# Altium PCB 电机控制PCB.PcbDoc
Units mm, origin at the board's own origin, x right, y up, seen from the top; angles counter-clockwise.
Board outline 67.08 x 50.94 mm, 2 copper layers (Top Layer, Bottom Layer); 44 components, 44 nets, 212 pads, 111 vias.
Unrouted connection lines stored in the file: 123.
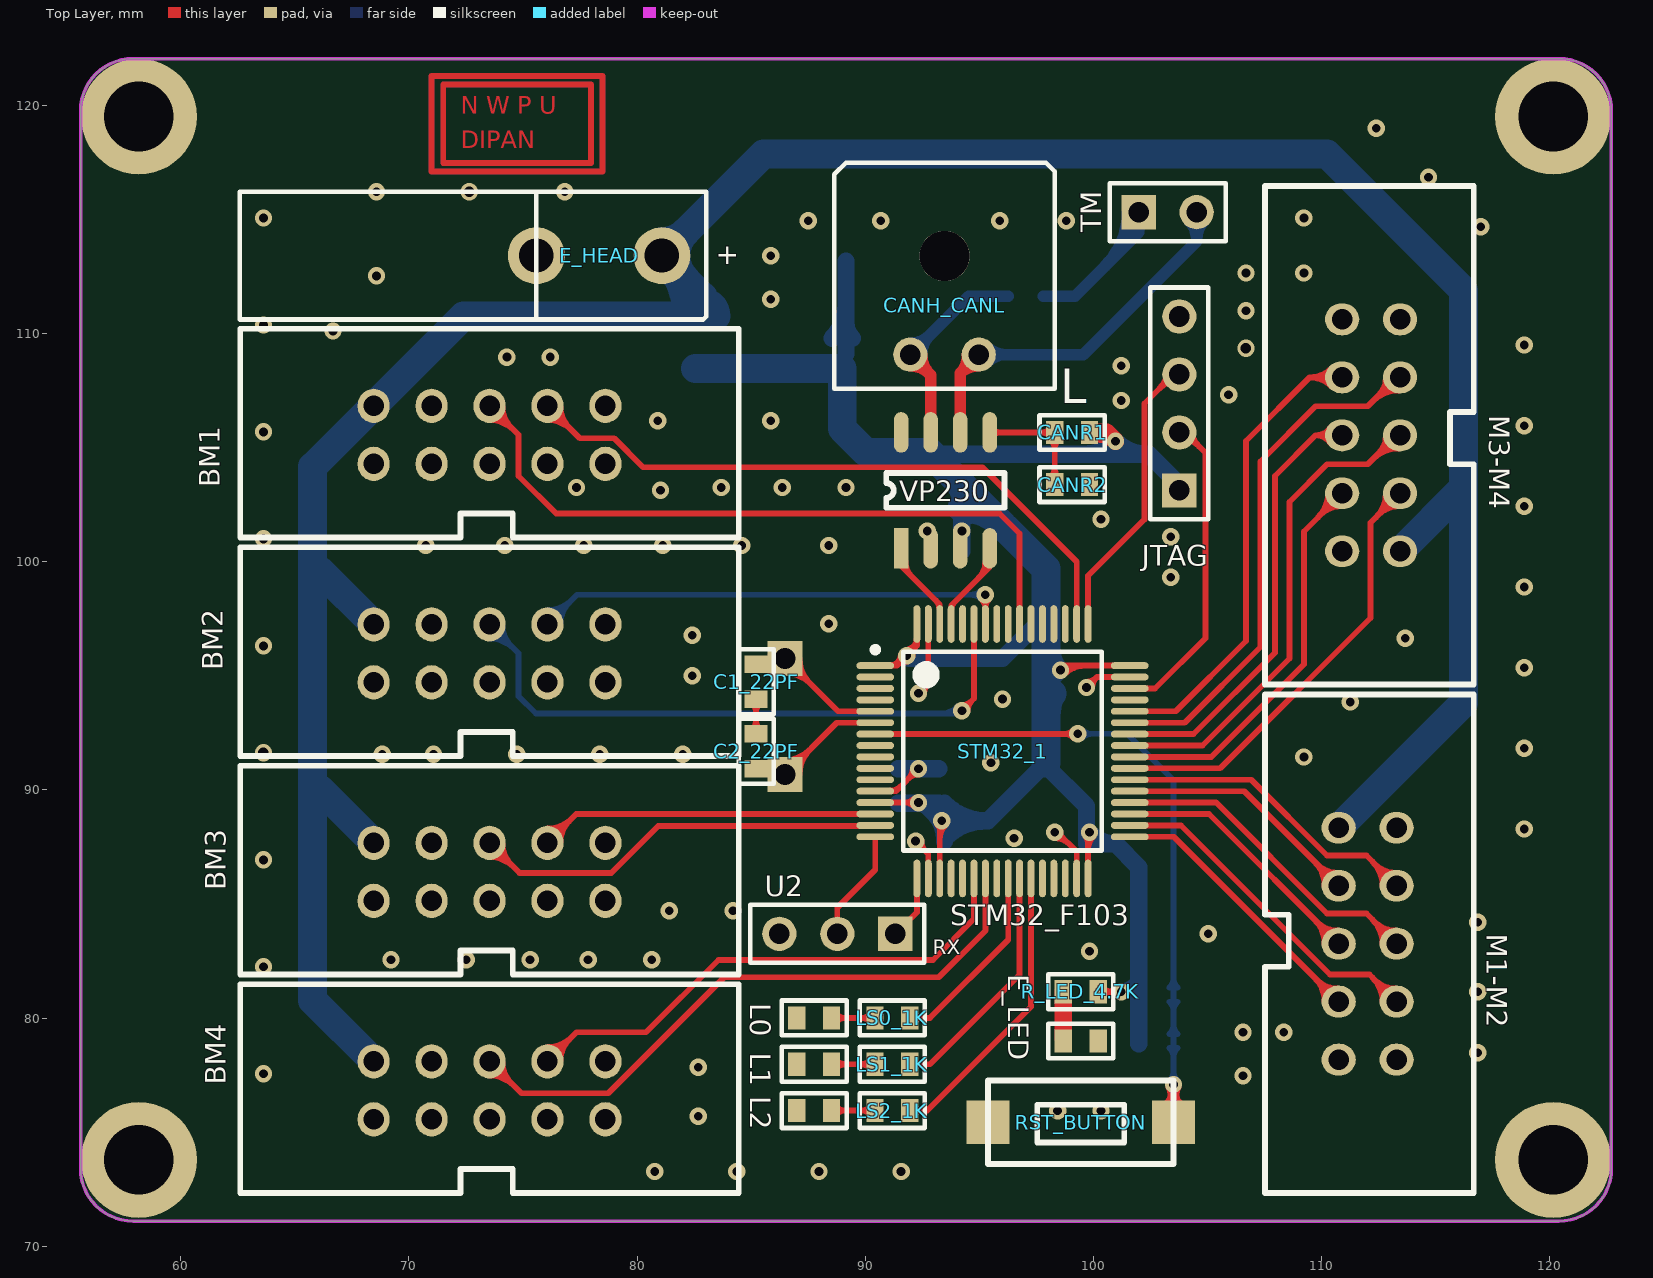
[diagram p0: Top Layer view]
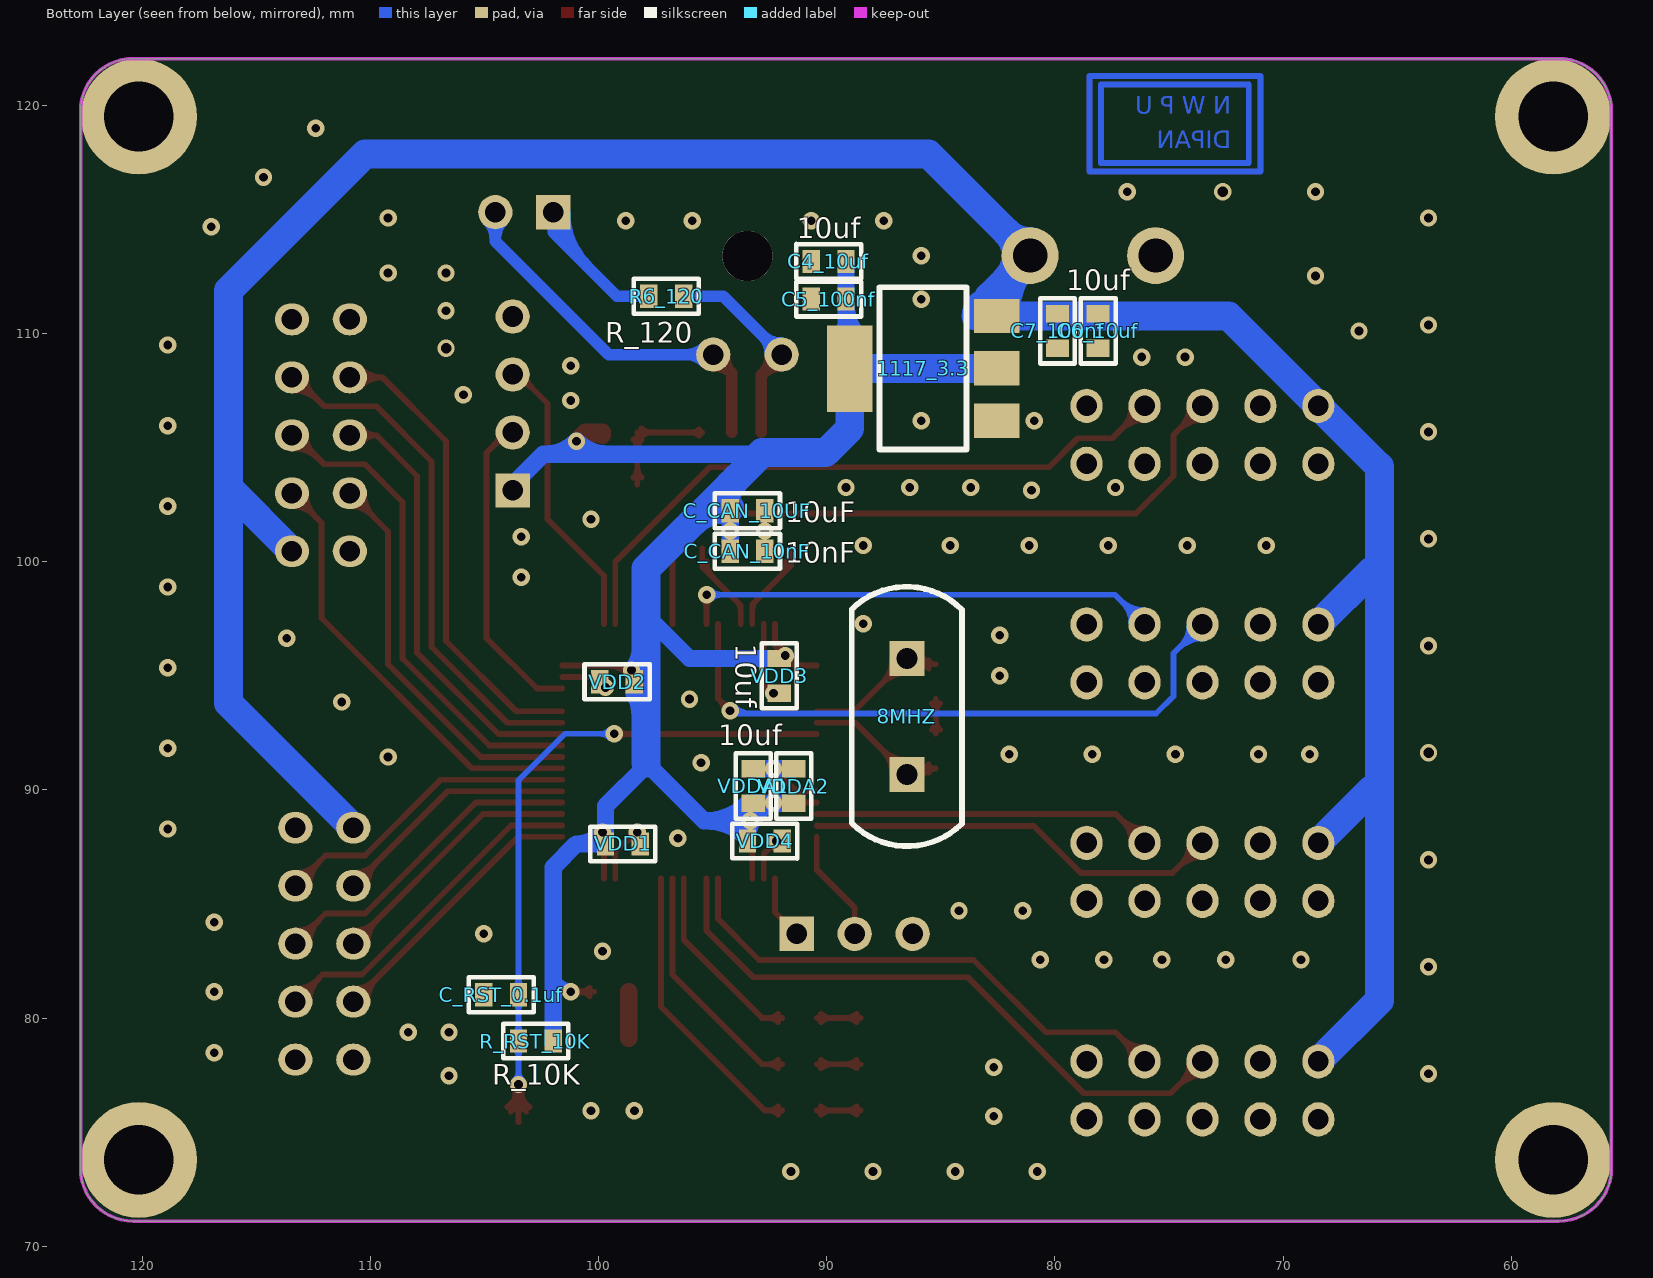
[diagram p1: Bottom Layer view, seen from below]

## Layer stack, top to bottom
Top Layer: signal copper 0.0356
Dielectric: dielectric 0.32, FR-4, Dk 4.8
Bottom Layer: signal copper 0.0356

## Board outline
57.912,71.106 cw(c57.912,73.406) 55.612,73.406 55.612,119.747 cw(c57.912,119.747) 57.912,122.047 120.396,122.047 cw(c120.396,119.747) 122.696,119.747 122.696,73.406 cw(c120.396,73.406) 120.396,71.106

## Design rules (kind name [scope] priority, off if disabled: settings)
Clearance [All] p1: gap=0.152
ComponentClearance [All] p1 off: gap=0 collisioncheckmode=3 verticalgap=2540 showdistances=FALSE
PlaneConnect [All] p1: planeconnectstyle=Direct reliefexpansion=0.508 reliefentries=4 reliefconductorwidth=0.254 reliefairgap=0.254
PolygonConnect [All] p1: connectstyle=Direct reliefconductorwidth=0.254 reliefentries=4 polygonreliefangle="90 Angle" airgapwidth=0.254
RoutingVias [All] p1: holewidth=0.508 width=0.762 viastyle="Through Hole" minholewidth=0.381 minwidth=0.635 maxholewidth=0.762 maxwidth=0.762
SolderMaskExpansion [All] p1: expansion=0.102
Width [All] p1: maxlimit=1.27 minlimit=0.051 preferedwidth=0.254
26 further rules are at their usual default settings.

## Components (designator, comment, footprint, x,y, rotation, side; value= is the part's Value field where it differs from the comment)
8MHZ "XTAL" XTAL_D 86.487,95.758 r270 bottom
1117_3.3 "1117_WYN" SOT-223_WYN 82.55,106.172 r90 bottom
BM1 "2*5BM" JTAG_10to20#1 73.533,104.289 r90 top
BM2 "2*5BM" JTAG_10to20#1 73.533,94.714 r90 top
BM3 "2*5BM" JTAG_10to20#1 73.533,85.14 r90 top (schematic designator BM4)
BM4 "2*5BM" JTAG_10to20#1 73.533,75.565 r90 top (schematic designator BM3)
C1_22PF "22pf" 0603_WYH 85.217,94.742 r90 top
C2_22PF "22pf" 0603_WYH 85.217,91.694 r270 top
C4_10uf "10uf" 0603_WYH 89.916,113.157 r0 bottom
C5_100nf "C_100nf" 0603_WYH 89.916,111.506 r0 bottom
C6_10uf "10uf" 0603_WYH 78.105,110.109 r270 bottom
C7_100nf "C_100nf" 0603_WYH 79.883,110.109 r270 bottom
C_CAN_10nF "10nF" 0603_WYH 93.472,100.457 r0 bottom
C_CAN_10UF "10uF" 0603_WYH 93.472,102.235 r0 bottom
C_RST_0.1uf "0.1uf" 0603_WYH 104.267,81.026 r0 bottom
CANH_CANL "CAN_HEADER" CAN信号 93.472,107.575 r90 top
CANR1 "1k" 0603_WYH 99.06,105.664 r0 top
CANR2 "1k" 0603_WYH 99.06,103.378 r0 top
E_HEAD "Header2" Power 62.584,113.411 r0 top
E_LED "LED_WYN" 0603_WYH 99.441,78.994 r0 top
JTAG "2_JTAG" 2_JTAG 103.759,103.124 r90 top
L0 "LED_WYN" 0603_WYH 87.757,80.01 r180 top (schematic designator LS0)
L1 "LED_WYN" 0603_WYH 87.757,77.978 r180 top (schematic designator LS1)
L2 "LED_WYN" 0603_WYH 87.757,75.946 r180 top (schematic designator LS2)
LS0_1K "10K" 0603_WYH 91.186,80.01 r180 top
LS1_1K "10K" 0603_WYH 91.186,77.978 r180 top
LS2_1K "10K" 0603_WYH 91.186,75.946 r180 top
M1-M2 "M1-M2" JTAG_10to20#2 110.744,83.261 r0 top (schematic designator BM3)
M3-M4 "M3-M4" JTAG_10to20#1 113.436,105.537 r180 top (schematic designator BM3)
R6_120 "R_120" 0603_WYH 97.028,111.633 r0 bottom (schematic designator R6_120Ω)
R_LED_4.7K "4.7K" 0603_WYH 99.441,81.153 r0 top
R_RST_10K "R_10K" 0603_WYH 102.743,78.994 r0 bottom
RST_BUTTON "RST_BUTTON" CLCK 103.505,75.438 r180 top
STM32_1 "STM32_F103" STM32TSQFP50P1200X1200X160-64N 96.012,91.694 r0 top
TM "Header2" HDR1X2 101.981,115.316 r0 top
U2 "三针串口" HDR1X3 88.773,83.693 r180 top (schematic designator USART3)
VDD1 "100nf" 0603_WYH 98.933,87.63 r180 bottom
VDD2 "100nf" 0603_WYH 99.187,94.742 r0 bottom
VDD3 "10uf" 0603_WYH 92.075,94.996 r270 bottom
VDD4 "100nf" 0603_WYH 92.71,87.757 r180 bottom
VDDA1 "10uf" 0603_WYH 93.218,90.17 r90 bottom
VDDA2 "100nf" 0603_WYH 91.44,90.17 r90 bottom
VP230 "VP230" VP230 91.567,100.584 r90 top
? "LOGO" LOGO 73.533,120.015 r0 top

## Footprints (in the part's own frame and the unit in brackets; to place one, negate y for a bottom-side part, rotate by r counter-clockwise, add the part's x,y. Pads: shape width x height; smd on the part's side, far side on the other; paste and mask are expansions set on the pad)
2_JTAG [mm]
  rect 1.5x1.5 hole 0.9: 1(0,0)
  round 1.5 hole 0.9: 2(2.54,0) 3(5.08,0) 4(7.62,0)
  silkscreen extent -1.27,-1.27 8.89,1.27
0603_WYH [mil]
  rect 30x40 smd: 1(-30,0) 2(30,0)
  silkscreen extent -56,-30 56,30
CAN信号 [mm]
  round 1.5 hole 0.9: 1(1.5,1.5) 2(1.5,-1.5)
  round 2.2 hole 2.2: 3(5.82,0)
  silkscreen extent 0,-4.83 9.91,4.83
CLCK [mil]
  rect 75x75 smd: 1(0,0) 2(320,0)
  silkscreen extent 0,-72 320,72
HDR1X2 [mm]
  rect 1.5x1.5 hole 0.9: 1(0,0)
  round 1.5 hole 0.9: 2(2.54,0)
  silkscreen extent -1.27,-1.27 3.81,1.27
HDR1X3 [mm] "Connector; Header; 3 Position"
  rect 1.5x1.5 hole 0.9: 1(-2.54,0)
  round 1.5 hole 0.9: 2(0,0) 3(2.54,0)
  silkscreen extent -3.81,-1.27 3.81,1.27
JTAG_10to20#1 [mil]
  oval 59x55 hole 35.4: 1(0,200) 2(0,100) 3(0,0) 4(0,-100) 5(0,-200) 6(100,-200) 7(100,-100) 8(100,0) 9(100,100) 10(100,200)
  silkscreen extent -127,-430 233,430
JTAG_10to20#2 [mil]
  oval 59x55 hole 35.4: 1(0,200) 2(0,100) 3(0,0) 4(0,-100) 6(100,-200) 7(100,-100) 8(100,0) 9(100,100) 10(100,200)
  oval 59x55 hole 35.4 mask+4: 5(0,-200)
  silkscreen extent -127,-430 233,430
LOGO [mm]
  Top Layer lines w0.254: -2.54,-2.921 -2.54,1.016 -2.54,1.27 4.953,1.27 4.953,-2.921 -2.54,-2.921 ; -2.032,-2.54 -2.032,0.889 4.445,0.889 4.445,-2.54 -2.032,-2.54
  Bottom Layer lines w0.254: -2.54,-2.921 -2.54,1.27 4.953,1.27 4.953,-2.921 -2.54,-2.921 ; -2.032,-2.54 -2.032,0.889 4.445,0.889 4.445,-2.54 -2.032,-2.54
Power [mm]
  round 2.5 hole 1.5: 1(18.5,0) 2(13,0)
  silkscreen extent 0,-2.8 20.45,2.8
SOT-223_WYN [mil]
  rect 59x79 smd: 1(0,0) 2(90.55,0) 3(181.1,0)
  rect 150x79 smd: 4(89.88,253.54)
  silkscreen extent -49,52 231,202
STM32TSQFP50P1200X1200X160-64N [mm] "TSQFP, 64-Leads, Body 12.0x12.0mm (max), Pitch 0.50mm, IPC Medium Density"
  oval 1.65x0.3 smd: 1(-5.575,3.75) 2(-5.575,3.25) 3(-5.575,2.75) 4(-5.575,2.25) 5(-5.575,1.75) 6(-5.575,1.25) 7(-5.575,0.75) 8(-5.575,0.25) 9(-5.575,-0.25) 10(-5.575,-0.75) 11(-5.575,-1.25) 12(-5.575,-1.75) 13(-5.575,-2.25) 14(-5.575,-2.75) 15(-5.575,-3.25) 16(-5.575,-3.75) 34(5.575,-3.25) 35(5.575,-2.75) 36(5.575,-2.25) 37(5.575,-1.75) 38(5.575,-1.25) 39(5.575,-0.75) 40(5.575,-0.25) 41(5.575,0.25) 42(5.575,0.75) 43(5.575,1.25) 44(5.575,1.75) 45(5.575,2.25) 46(5.575,2.75) 47(5.575,3.25) 48(5.575,3.75)
  oval 0.3x1.65 smd: 17(-3.75,-5.575) 18(-3.25,-5.575) 19(-2.75,-5.575) 20(-2.25,-5.575) 21(-1.75,-5.575) 22(-1.25,-5.575) 23(-0.75,-5.575) 24(-0.25,-5.575) 25(0.25,-5.575) 26(0.75,-5.575) 27(1.25,-5.575) 28(1.75,-5.575) 29(2.25,-5.575) 30(2.75,-5.575) 31(3.25,-5.575) 32(3.75,-5.575) 49(3.75,5.575) 50(3.25,5.575) 51(2.75,5.575) 52(2.25,5.575) 53(1.75,5.575) 54(1.25,5.575) 55(0.75,5.575) 56(0.25,5.575) 57(-0.25,5.575) 58(-0.75,5.575) 59(-1.25,5.575) 60(-1.75,5.575) 61(-2.25,5.575) 62(-2.75,5.575) 63(-3.25,5.575) 64(-3.75,5.575)
  oval 1.65x0.3 smd paste+0: 33(5.575,-3.75)
  silkscreen extent -5.7,-4.35 4.35,4.57, body extent -5,-5 5,5, height 1.6
VP230 [mil]
  rect 70x25 smd: 1(0,0)
  oval 70x25 smd: 2(0,-51) 3(0,-102) 4(0,-153) 5(200,-153) 6(200,-102) 7(200,-51) 8(200,0)
  silkscreen extent 70,-179 130,26
XTAL_D [mil]
  rect 60x60 hole 36 paste+0: 1(0,0) 2(200,0)
  silkscreen extent -124,-95 324,95

## Part data
C1_22PF C2_22PF C4_10uf C5_100nf C6_10uf C7_100nf C_CAN_10nF C_CAN_10UF C_RST_0.1uf VDD1 VDD2 VDD3 VDD4 VDDA1 VDDA2: library part CAP_WYN
CANR1 CANR2 LS0_1K LS1_1K LS2_1K R6_120 R_RST_10K: library part R
M1-M2 M3-M4: library part 电机接口
R_LED_4.7K: library part RES_WYN

## Free pads (board coordinates)
  round 5.08 hole 3.048: 1(120.142,119.507) 2(120.142,73.787) 3(58.166,73.787) 6(58.166,119.507)

## Via types
v1: diameter 0.762, hole 0.381, Top Layer to Bottom Layer, 108 vias
v2: diameter 0.762, hole 0.457, Top Layer to Bottom Layer, 3 vias

## Nets (pads, with @x,y where several pads share a name; then routed paths per layer and width w, separated by ;. In a path a pad name is that pad's centre, name@x,y a point inside that pad or via, vN(x,y) a via of type N, cw(c..) or ccw(c..) an arc to the next point about the centre after c; other vN are vias at no path point)
B1_PA15: BM1.7 STM32_1.50 | length 31.6
  Top Layer w0.254: BM1.7@76.073,106.207 cw(c76.073,104.704) 77.135,105.767 ; BM1.7@76.073,106.461 cw(c76.073,105.572) 76.702,106.2 ; BM1.7 77.492,105.41 78.994,105.41 80.264,104.14 95.123,104.14 99.262,100.001 STM32_1.50 ; BM1.7@76.644,106.778 ccw(c77.902,106.778) 77.013,105.889
B1_PB3: BM1.8 STM32_1.55 | length 33.4
  Top Layer w0.254: BM1.8@73.533,106.207 cw(c73.533,104.704) 74.595,105.767 ; BM1.8@73.533,106.461 cw(c73.533,105.572) 74.162,106.2 ; BM1.8 74.803,105.559 74.803,103.759 76.454,102.108 95.885,102.108 96.762,101.231 STM32_1.55 ; BM1.8@74.105,106.778 ccw(c75.362,106.778) 74.473,105.889
B2_PA6: BM4.7 STM32_1.22 | length 25.9
  Top Layer w0.254: BM4.7 77.343,79.375 80.391,79.375 83.566,82.55 92.964,82.55 94.762,84.348 STM32_1.22 ; BM4.7@76.073,78.473 ccw(c76.073,79.362) 76.702,78.734 ; BM4.7@76.073,78.727 ccw(c76.073,80.23) 77.135,79.167 ; BM4.7@76.644,78.156 cw(c77.902,78.156) 77.013,79.045
B2_PA7: BM4.8 STM32_1.23 | length 30.4
  Top Layer w0.254: BM4.8@73.533,77.483 cw(c73.533,75.98) 74.595,77.043 ; BM4.8@73.533,77.737 cw(c73.533,76.848) 74.162,77.476 ; BM4.8 74.93,76.708 78.74,76.708 83.82,81.788 93.218,81.788 95.262,83.832 STM32_1.23 ; BM4.8@74.105,78.054 ccw(c75.362,78.054) 74.473,77.165
B3_PB6: BM2.7 STM32_1.58 | length 25.7
  Top Layer w0.254: v1@95.07,98.372 cw(c94.608,97.91) STM32_1.58@95.262,97.91 ; STM32_1.58 v1@95.262,98.437 ; STM32_1.58@95.262,97.968 cw(c95.834,97.968) v1@95.43,98.372
  Bottom Layer w0.254: BM2.7 77.371,98.552 v1(95.25,98.552) ; BM2.7@76.073,97.623 ccw(c76.073,98.512) 76.702,97.883 ; BM2.7@76.073,97.877 ccw(c76.073,99.379) 77.135,98.317 ; BM2.7@76.644,97.305 cw(c77.902,97.305) 77.013,98.194 ; v1@95.07,98.372 ccw(c94.637,97.939) 94.637,98.552 ccw(c94.637,99.165) v1@95.07,98.732
B3_PB7: BM2.8 STM32_1.59 | length 32.1
  Top Layer w0.254: v1(94.234,93.472) 94.762,94 STM32_1.59 ; v1@94.234,93.726 ccw(c94.234,94.339) 94.668,93.906 ccw(c95.101,93.472) v1@94.488,93.472
  Bottom Layer w0.254: BM2.8@73.533,96.632 cw(c73.533,95.13) 74.595,96.192 ; BM2.8@73.533,96.886 cw(c73.533,95.997) 74.162,96.626 ; BM2.8 74.803,95.984 74.803,94.107 75.565,93.345 v1@94.234,93.345 ; BM2.8@74.105,97.204 ccw(c75.362,97.204) 74.473,96.315 ; 93.314,93.345 ccw(c93.314,94.392) v1@94.054,93.652
B4_PA0: BM3.7 STM32_1.14 | length 17.8
  Top Layer w0.254: BM3.7 77.337,88.944 STM32_1.14 ; BM3.7@76.073,88.048 ccw(c76.073,88.937) 76.702,88.308 ; BM3.7@76.073,88.302 ccw(c76.073,89.804) 77.135,88.742 ; BM3.7@76.644,87.731 cw(c77.902,87.731) 77.013,88.619
B4_PA1: BM3.8 STM32_1.15 | length 21.2
  Top Layer w0.254: BM3.8@73.533,87.057 cw(c73.533,85.555) 74.595,86.617 ; BM3.8@73.533,87.311 cw(c73.533,86.422) 74.162,87.051 ; BM3.8 74.853,86.36 78.867,86.36 80.929,88.422 90.415,88.422 STM32_1.15 ; BM3.8@74.105,87.629 ccw(c75.362,87.629) 74.473,86.74
CANH: CANH_CANL.1 R6_120.1 VP230.7 | length 12.9
  Top Layer w0.508: CANH_CANL.1@91.972,108.579 cw(c91.972,107.396) 92.808,108.233 ; CANH_CANL.1@91.972,109.069 92.862,108.179 VP230.7 ; CANH_CANL.1@92.468,109.075 ccw(c93.68,109.075) 92.823,108.218
  Bottom Layer w0.508: CANH_CANL.1 94.53,111.633 R6_120.1 ; CANH_CANL.1@91.972,109.571 ccw(c91.972,110.768) 92.819,109.922 ccw(c93.665,109.075) CANH_CANL.1@92.468,109.075
CANL: CANH_CANL.2 TM.2 VP230.6 | length 22.2
  Top Layer w0.508: VP230.6 94.158,108.255 ; CANH_CANL.2@94.476,109.059 cw(c93.388,109.025) 94.158,108.255 ; CANH_CANL.2@94.962,108.579 ccw(c94.941,107.472) 94.158,108.255 ; CANH_CANL.2@94.972,109.069 94.158,108.255
  Bottom Layer w0.508: CANH_CANL.2 99.55,109.075 104.521,114.046 TM.2 ; CANH_CANL.2@95.323,108.724 cw(c96.169,107.878) 96.169,109.075 cw(c96.169,110.272) CANH_CANL.2@95.323,109.426 ; TM.2@104.17,114.965 cw(c103.324,114.119) 104.521,114.119 cw(c105.718,114.119) TM.2@104.872,114.965
CANRX: STM32_1.61 VP230.4 | length 5.1
  Top Layer w0.254: STM32_1.61 93.762,98.08 95.453,99.771 VP230.4 ; STM32_1.61@93.785,97.944 cw(c94.169,97.944) 93.897,98.215 ; 94.957,99.275 ccw(c94.22,100.013) VP230.4@95.263,100.013
CANTX: STM32_1.62 VP230.1 | length 5.1
  Top Layer w0.254: VP230.1 91.567,99.822 93.262,98.127 STM32_1.62 ; VP230.1@91.757,100.012 ccw(c92.677,100.012) 92.027,99.362 ; 93.093,98.296 cw(c92.742,97.944) STM32_1.62@93.239,97.944
GND: 1117_3.3.1 BM1.2 BM2.2 BM3.2 BM4.2 C1_22PF.1 C2_22PF.1 C4_10uf.2 C5_100nf.2 C6_10uf.2 C7_100nf.2 C_CAN_10nF.1 C_CAN_10UF.1 C_RST_0.1uf.2 CANR2.2 E_HEAD.2 E_LED.2 JTAG.4 L0.2 L1.2 L2.2 M1-M2.5 M3-M4.5 RST_BUTTON.2 STM32_1.12 STM32_1.18 STM32_1.28 STM32_1.31 STM32_1.47 STM32_1.63 U2.3 VDD1.2 VDD2.2 VDD3.2 VDD4.2 VDDA1.2 VDDA2.2 VP230.2 VP230.8 | length 22.4
  Top Layer w0.254: C2_22PF.1@85.037,92.636 ccw(c84.604,93.069) 85.217,93.069 ccw(c85.83,93.069) C2_22PF.1@85.397,92.636 ; C1_22PF.1@85.037,93.8 cw(c84.604,93.367) 85.217,93.367 cw(c85.83,93.367) C1_22PF.1@85.397,93.8 ; C2_22PF.1 C1_22PF.1 ; STM32_1.12 91.341,89.944 v1(92.329,90.932) ; STM32_1.12@91.112,89.967 ccw(c91.112,90.575) 91.542,90.145 ; v1@92.075,90.932 cw(c91.462,90.932) 91.895,90.498 cw(c92.329,90.065) v1@92.329,90.678 ; v1@92.202,87.503 cw(c92.202,86.89) 92.636,87.323 cw(c93.069,87.757) v1@92.456,87.757 ; v1(92.202,87.757) 92.762,87.197 STM32_1.18 ; v1(92.329,94.234) 92.762,94.667 ; v1@92.329,94.488 ccw(c92.33,95.099) 92.762,94.667 ; v1@92.583,94.234 cw(c93.194,94.235) 92.762,94.667 ; STM32_1.63 92.762,94.667 ; v1@98.298,87.884 cw(c98.298,86.964) 98.948,87.615 ; v1@98.425,88.138 99.262,87.301 STM32_1.31 ; v1@98.552,88.138 ccw(c98.859,88.138) 98.642,87.921 ; v1(99.695,94.488) 100.151,94.944 STM32_1.47 ; v1@99.695,94.742 ccw(c99.695,95.355) 100.129,94.922 ccw(c100.562,94.488) v1@99.949,94.488
  Bottom Layer w0.762: VDDA2.2 VDDA1.2
  other v1: 80.772,73.279 84.37,73.279 87.969,73.279 91.567,73.279 82.677,75.692 98.425,75.946 100.33,75.946 106.553,77.47 63.627,77.555 82.677,77.851 116.84,78.486 106.553,79.375 108.331,79.375 116.84,81.153 63.627,82.243 69.215,82.55 72.517,82.55 75.311,82.55 77.851,82.55 80.645,82.55 99.822,82.931 105.029,83.693 116.84,84.201 81.407,84.709 84.201,84.709 63.627,86.931 96.52,87.884 98.298,88.138 118.872,88.286 95.504,91.186 109.22,91.44 68.834,91.567 71.078,91.567 74.718,91.567 78.359,91.567 82,91.567 118.872,91.821 111.252,93.853 96.012,93.98 82.423,94.996 118.872,95.356 63.627,96.308 113.665,96.647 82.423,96.774 88.392,97.282 118.872,98.891 103.378,99.314 70.739,100.711 74.2,100.711 77.66,100.711 81.121,100.711 84.582,100.711 88.392,100.711 63.627,100.997 103.378,101.092 92.71,101.346 100.33,101.854 118.872,102.425 81.026,103.124 77.343,103.251 83.693,103.251 86.36,103.251 89.154,103.251 63.627,105.685 118.872,105.96 80.899,106.172 85.852,106.172 101.219,107.061 105.918,107.315 101.219,108.585 74.295,108.966 76.2,108.966 118.872,109.495 66.675,110.109 63.627,110.374 106.68,110.998 85.852,111.506 68.58,112.522 106.68,112.649 109.22,112.649 85.852,113.411 116.967,114.681 87.503,114.935 90.678,114.935 95.885,114.935 98.806,114.935 63.627,115.062 109.22,115.062 68.58,116.205 76.835,116.205 114.681,116.84 112.395,118.999
  other v2: 63.627,91.62 106.68,109.347 72.644,116.205
JTCK: JTAG.3 STM32_1.49 | length 14.8
  Top Layer w0.254: STM32_1.49 99.762,99.381 102.235,101.854 102.235,106.934 JTAG.3@103.759,108.458 ; JTAG.3@103.251,108.458 cw(c102.025,108.458) 102.892,107.591 cw(c103.759,106.724) JTAG.3@103.759,107.95
JTMS: JTAG.2 STM32_1.46 | length 15.9
  Top Layer w0.254: STM32_1.46 102.699,94.444 104.902,96.647 104.902,104.775 JTAG.2@103.759,105.918 ; JTAG.2@103.759,105.41 cw(c103.759,104.184) 104.626,105.051 cw(c105.493,105.918) JTAG.2@104.267,105.918
JTRST: STM32_1.56
LS0: LS0_1K.1 STM32_1.25 | length 9.4
  Top Layer w0.254: LS0_1K.1 92.837,80.01 96.262,83.435 STM32_1.25 ; LS0_1K.1@92.128,79.83 cw(c92.561,79.397) 92.561,80.01 cw(c92.561,80.623) LS0_1K.1@92.128,80.19
LS1: LS1_1K.1 STM32_1.26 | length 11.6
  Top Layer w0.254: LS1_1K.1 92.837,77.978 96.762,81.903 STM32_1.26 ; LS1_1K.1@92.128,77.798 cw(c92.561,77.365) 92.561,77.978 cw(c92.561,78.591) LS1_1K.1@92.128,78.158
LS2: LS2_1K.1 STM32_1.27 | length 13.8
  Top Layer w0.254: LS2_1K.1 92.71,75.946 97.262,80.498 STM32_1.27 ; LS2_1K.1@92.128,75.766 cw(c92.561,75.333) 92.561,75.946 cw(c92.561,76.559) LS2_1K.1@92.128,76.126
M1_PC6: M1-M2.2 STM32_1.37 | length 13.7
  Top Layer w0.254: STM32_1.37 106.601,89.944 M1-M2.2 ; 109.682,86.864 cw(c108.619,85.801) M1-M2.2@110.122,85.801 ; 109.804,86.741 ccw(c110.693,87.63) M1-M2.2@110.693,86.373 ; 110.115,86.43 cw(c109.487,85.801) M1-M2.2@110.376,85.801
M2_PC7: M1-M2.9 STM32_1.38 | length 16.5
  Top Layer w0.254: STM32_1.38 106.914,90.444 110.236,87.122 111.963,87.122 M1-M2.9 ; 112.222,86.864 cw(c111.159,85.801) M1-M2.9@112.662,85.801 ; 112.344,86.741 ccw(c113.233,87.63) M1-M2.9@113.233,86.373 ; 112.655,86.43 cw(c112.027,85.801) M1-M2.9@112.916,85.801
M3_PC8: M3-M4.2 STM32_1.39 | length 22.1
  Top Layer w0.254: STM32_1.39 105.549,90.944 112.141,97.536 112.141,101.702 M3-M4.2 ; 112.374,101.935 ccw(c111.312,102.997) M3-M4.2@112.814,102.997 ; 112.497,102.057 cw(c113.386,101.168) M3-M4.2@113.386,102.425 ; 112.808,102.368 ccw(c112.179,102.997) M3-M4.2@113.068,102.997
M4_PC9: M3-M4.9 STM32_1.40 | length 20.4
  Top Layer w0.254: STM32_1.40 105.16,91.444 109.22,95.504 109.22,101.321 M3-M4.9 ; 109.834,101.935 ccw(c108.772,102.997) M3-M4.9@110.274,102.997 ; 109.957,102.057 cw(c110.846,101.168) M3-M4.9@110.846,102.425 ; 110.268,102.368 ccw(c109.639,102.997) M3-M4.9@110.528,102.997
M_PA8: M3-M4.3 STM32_1.41 | length 24.3
  Top Layer w0.254: STM32_1.41 104.771,91.944 108.585,95.758 108.585,102.616 110.236,104.267 112.014,104.267 M3-M4.3@113.284,105.537 ; 112.237,104.49 cw(c113.386,103.34) M3-M4.3@113.386,104.965 ; 112.482,104.735 ccw(c111.68,105.537) M3-M4.3@112.814,105.537 ; 112.67,104.923 cw(c113.386,104.208) M3-M4.3@113.386,105.219
M_PA9: M3-M4.8 STM32_1.42 | length 20.8
  Top Layer w0.254: STM32_1.42 104.382,92.444 107.95,96.012 107.95,103.759 109.728,105.537 ; M3-M4.8@110.382,105.202 ccw(c109.728,104.73) 109.728,105.537 ; M3-M4.8@110.382,105.872 cw(c109.728,106.344) 109.728,105.537 ; M3-M4.8 109.728,105.537
M_PA10: M3-M4.4 STM32_1.43 | length 25.7
  Top Layer w0.254: STM32_1.43 103.993,92.944 107.315,96.266 107.315,104.394 109.728,106.807 112.014,106.807 M3-M4.4@113.284,108.077 ; 112.237,107.03 cw(c113.386,105.88) M3-M4.4@113.386,107.505 ; 112.482,107.275 ccw(c111.68,108.077) M3-M4.4@112.814,108.077 ; 112.67,107.463 cw(c113.386,106.748) M3-M4.4@113.386,107.759
M_PA11: M3-M4.7 STM32_1.44 | length 23.7
  Top Layer w0.254: STM32_1.44 103.604,93.444 106.68,96.52 106.68,105.283 109.474,108.077 ; M3-M4.7@110.44,107.675 ccw(c109.474,106.717) 109.474,108.077 ; M3-M4.7@110.44,108.479 cw(c109.474,109.437) 109.474,108.077 ; M3-M4.7@110.62,107.853 ccw(c110.084,107.321) 110.084,108.077 ccw(c110.084,108.833) M3-M4.7@110.62,108.301 ; M3-M4.7@110.744,108.077 109.474,108.077
M_PB12: M1-M2.4 STM32_1.33 | length 15.5
  Top Layer w0.254: STM32_1.33 103.521,87.944 M1-M2.4 M1-M2.4@110.287,80.721 ; 109.682,81.784 cw(c108.619,80.721) M1-M2.4@110.122,80.721 ; 109.804,81.661 ccw(c110.693,82.55) M1-M2.4@110.693,81.293 ; 110.115,81.35 cw(c109.487,80.721) M1-M2.4@110.376,80.721
M_PB13: M1-M2.7 STM32_1.34 | length 17.8
  Top Layer w0.254: STM32_1.34 103.834,88.444 110.363,81.915 112.09,81.915 M1-M2.7 ; 112.222,81.784 cw(c111.159,80.721) M1-M2.7@112.662,80.721 ; 112.344,81.661 ccw(c113.233,82.55) M1-M2.7@113.233,81.293 ; 112.655,81.35 cw(c112.027,80.721) M1-M2.7@112.916,80.721
M_PB14: M1-M2.3 STM32_1.35 | length 14.4
  Top Layer w0.254: STM32_1.35 105.061,88.944 M1-M2.3 ; 109.682,84.324 cw(c108.619,83.261) M1-M2.3@110.122,83.261 ; 109.804,84.201 ccw(c110.693,85.09) M1-M2.3@110.693,83.833 ; 110.115,83.89 cw(c109.487,83.261) M1-M2.3@110.376,83.261
M_PB15: M1-M2.8 STM32_1.36 | length 17.1
  Top Layer w0.254: STM32_1.36 105.374,89.444 110.236,84.582 111.963,84.582 M1-M2.8 ; 112.222,84.324 cw(c111.159,83.261) M1-M2.8@112.662,83.261 ; 112.344,84.201 ccw(c113.233,85.09) M1-M2.8@113.233,83.833 ; 112.655,83.89 cw(c112.027,83.261) M1-M2.8@112.916,83.261
NetCANR1_1: CANR1.1 CANR2.1 VP230.5 | length 8.7
  Top Layer w0.254: VP230.5 CANR1.1 CANR2.1 ; VP230.5@95.588,105.529 cw(c95.913,105.204) 95.913,105.664 cw(c95.913,106.124) VP230.5@95.588,105.799 ; CANR2.1@98.118,103.685 ccw(c97.685,104.118) 98.298,104.118 ccw(c98.911,104.118) CANR2.1@98.478,103.685 ; CANR1.1@98.118,105.357 cw(c97.685,104.924) 98.298,104.924 cw(c98.911,104.924) CANR1.1@98.478,105.357 ; CANR1.1@98.118,105.484 ccw(c97.685,105.051) 97.685,105.664 ccw(c97.685,106.277) CANR1.1@98.118,105.844
NetE_LED_1: E_LED.1 R_LED_4.7K.1 | length 2
  Top Layer w0.762: E_LED.1@98.679,79.121 R_LED_4.7K.1
NetL0_1: L0.1 LS0_1K.2 | length 3.8
  Top Layer w0.254: L0.1 LS0_1K.2 ; L0.1@88.699,79.83 cw(c89.132,79.397) 89.132,80.01 cw(c89.132,80.623) L0.1@88.699,80.19 ; LS0_1K.2@90.244,79.83 ccw(c89.811,79.397) 89.811,80.01 ccw(c89.811,80.623) LS0_1K.2@90.244,80.19
NetL1_1: L1.1 LS1_1K.2 | length 3.8
  Top Layer w0.254: L1.1 LS1_1K.2 ; L1.1@88.699,77.798 cw(c89.132,77.365) 89.132,77.978 cw(c89.132,78.591) L1.1@88.699,78.158 ; LS1_1K.2@90.244,77.798 ccw(c89.811,77.365) 89.811,77.978 ccw(c89.811,78.591) LS1_1K.2@90.244,78.158
NetL2_1: L2.1 LS2_1K.2 | length 3.8
  Top Layer w0.254: L2.1 LS2_1K.2 ; L2.1@88.699,75.766 cw(c89.132,75.333) 89.132,75.946 cw(c89.132,76.559) L2.1@88.699,76.126 ; LS2_1K.2@90.244,75.766 ccw(c89.811,75.333) 89.811,75.946 ccw(c89.811,76.559) LS2_1K.2@90.244,76.126
NetR6_120_2: R6_120.2 TM.1 | length 11.6
  Bottom Layer w0.508: R6_120.2 99.187,111.633 101.981,114.427 ; 100.506,112.952 ccw(c98.141,115.316) TM.1@101.485,115.316 ; 101.373,113.819 ccw(c99.876,115.316) TM.1@101.993,115.316 ; TM.1@101.721,114.894 cw(c101.432,114.427) 101.981,114.427 ; TM.1 101.981,114.427 ; TM.1@102.241,114.894 ccw(c102.53,114.427) 101.981,114.427
RESET: C_RST_0.1uf.1 R_RST_10K.2 RST_BUTTON.1 STM32_1.7 | length 42.3
  Top Layer w0.254: STM32_1.7 v1@99.314,92.444 ; 98.672,92.444 ccw(c98.672,93.098) v1@99.134,92.636 ; 98.73,92.444 cw(c98.73,91.872) v1@99.134,92.276 ; RST_BUTTON.1@103.01,76.098 ccw(c102.267,77.089) v1(103.505,77.089) ; RST_BUTTON.1@103.162,75.895 ccw(c102.648,76.581) 103.505,76.581 ccw(c104.362,76.581) RST_BUTTON.1@103.848,75.895 ; v1@103.285,76.962 cw(c102.754,76.655) 103.346,76.497 cw(c103.939,76.338) v1@103.632,76.869 ; v1@103.325,76.909 cw(c102.892,76.476) 103.505,76.476 cw(c104.118,76.476) v1@103.685,76.909 ; v1@103.378,76.869 cw(c103.071,76.338) 103.664,76.497 cw(c104.256,76.655) v1@103.725,76.962 ; RST_BUTTON.1 v1(103.505,77.089) ; RST_BUTTON.1@104,76.098 cw(c104.743,77.089) v1(103.505,77.089)
  Bottom Layer w0.254: v1(99.314,92.456) 101.473,92.456 103.505,90.424 v1@103.505,77.216 ; v1@99.494,92.276 cw(c99.927,91.843) 99.927,92.456 cw(c99.927,93.069) v1@99.494,92.636 ; v1@103.325,77.269 ccw(c102.892,77.702) 103.505,77.702 ccw(c104.118,77.702) v1@103.685,77.269 ; R_RST_10K.2@103.325,78.687 cw(c102.892,78.254) 103.505,78.254 cw(c104.118,78.254) R_RST_10K.2@103.685,78.687 ; R_RST_10K.2@103.325,79.301 ccw(c102.892,79.734) 103.505,79.734 ccw(c104.118,79.734) R_RST_10K.2@103.685,79.301 ; C_RST_0.1uf.1@103.325,80.719 cw(c102.892,80.286) 103.505,80.286 cw(c104.118,80.286) C_RST_0.1uf.1@103.685,80.719 ; C_RST_0.1uf.1@103.325,81.333 ccw(c102.892,81.766) 103.505,81.766 ccw(c104.118,81.766) C_RST_0.1uf.1@103.685,81.333
U2_RX: STM32_1.17 U2.1 | length 2.9
  Top Layer w0.254: U2.1@91.123,83.883 91.504,83.883 92.262,84.642 STM32_1.17
U2_TX: STM32_1.16 U2.2 | length 4.9
  Top Layer w0.254: U2.2 88.773,84.836 90.437,86.5 STM32_1.16
VCC_3.3V: 1117_3.3.2 1117_3.3.4 C4_10uf.1 C5_100nf.1 C_CAN_10nF.2 C_CAN_10UF.2 CANR1.2 JTAG.1 R_LED_4.7K.2 R_RST_10K.1 STM32_1.1 STM32_1.13 STM32_1.19 STM32_1.32 STM32_1.48 STM32_1.64 VDD1.1 VDD2.1 VDD3.1 VDD4.1 VDDA1.1 VDDA2.1 VP230.3 | length 128.9
  Top Layer w0.254: STM32_1.13 v1@92.238,89.444 ; STM32_1.1 91.38,95.444 v1(91.821,95.885) 92.262,96.326 STM32_1.64 ; STM32_1.1@91.112,95.467 ccw(c91.112,96.17) v1@91.609,95.673 ; STM32_1.1@91.255,95.469 ccw(c90.931,96.029) v1@91.57,95.926 ; 91.491,95.605 cw(c91.665,95.304) v1@91.755,95.64 ; v1@91.567,95.885 cw(c90.954,95.885) 91.387,95.451 cw(c91.821,95.018) v1@91.821,95.631 ; v1@91.78,96.136 ccw(c91.677,96.775) STM32_1.64@92.237,96.451 ; v1@91.821,96.139 ccw(c91.821,96.752) 92.255,96.319 ccw(c92.688,95.885) v1@92.075,95.885 ; v1@92.033,96.097 ccw(c91.536,96.594) STM32_1.64@92.239,96.594 ; v1@92.066,95.951 cw(c92.402,96.041) 92.101,96.215 ; v1@92.149,89.264 ccw(c91.716,88.831) 91.716,89.444 ccw(c91.716,90.057) v1@92.149,89.624 ; v1@93.165,88.466 cw(c92.932,88.233) 93.262,88.233 ; STM32_1.19 93.262,88.563 v1(93.345,88.646) ; 93.262,87.832 cw(c94.159,87.832) v1@93.525,88.466 ; v1@98.732,95.07 cw(c99.634,94.168) 99.634,95.444 ; 99.02,95.444 ccw(c99.02,94.782) v1(98.552,95.25) 98.746,95.444 STM32_1.48 ; v1@99.642,87.958 cw(c99.354,87.67) 99.762,87.67 ; STM32_1.32 99.762,88.078 v1(99.822,88.138) ; 99.762,87.38 cw(c100.58,87.38) v1@100.002,87.958 ; R_LED_4.7K.2 v1(101.219,81.153) ; R_LED_4.7K.2@100.383,80.973 cw(c100.816,80.54) 100.816,81.153 cw(c100.816,81.766) R_LED_4.7K.2@100.383,81.333 ; v1@101.039,80.973 ccw(c100.606,80.54) 100.606,81.153 ccw(c100.606,81.766) v1@101.039,81.333
  Top Layer w0.762: CANR1.2@99.822,105.537 cw(c100.194,104.512) v1(100.965,105.283) ; CANR1.2 100.584,105.664 v1(100.965,105.283) ; CANR1.2@100.045,105.664 cw(c100.045,104.363) v1(100.965,105.283)
  Bottom Layer w0.254: v1(101.219,81.153) 101.981,81.915 ; v1@101.219,81.407 ccw(c101.219,82.02) 101.653,81.587 ccw(c102.086,81.153) v1@101.473,81.153
  Bottom Layer w0.762: 1117_3.3.4@88.55,109.797 ccw(c87.092,111.255) C5_100nf.1@89.154,111.255 ; 1117_3.3.4@89.154,109.107 C5_100nf.1 C4_10uf.1 ; 89.154,110.463 ccw(c90.096,110.463) 1117_3.3.4@89.43,109.797 ; VDDA2.1 v1@92.583,89.408 ; VDD3.1@91.948,95.758 96.012,95.758 97.917,97.663 ; v1(92.329,89.444) cw(c92.329,88.918) 92.701,89.29 ; 93.023,88.968 cw(c91.939,87.884) VDD4.1@93.472,87.884 ; 93.029,104.713 102.424,104.713 JTAG.1@103.759,103.378 ; VDDA1.1 v1@92.583,89.408 ; VDD4.1 93.472,88.646 95.377,88.646 97.853,91.123 99.695,89.281 VDD1.1 100.965,87.63 ; VDDA1.1@93.472,89.408 ccw(c95.312,91.248) 95.312,88.646 ccw(c95.312,86.044) VDD4.1@93.472,87.884 ; C_CAN_10nF.2 94.234,103.378 ; 99.59,104.713 ccw(c99.59,106.658) v1(100.965,105.283) ccw(c102.34,106.658) 102.34,104.713 ; v1(99.822,88.138) ccw(c100.965,89.17) 100.965,87.63 ; R_RST_10K.1@101.981,78.867 R_RST_10K.1 101.981,81.915 101.981,86.614 100.965,87.63 ; v1@92.583,89.408 v1(93.345,88.646) cw(c92.875,88.176) VDD4.1@93.472,87.884
  Bottom Layer w1.27: 1117_3.3.2 88.973,108.472 1117_3.3.4 88.99,105.828 90.043,104.775 92.837,104.775 ; 92.964,104.648 94.234,103.378 ; 93.949,103.663 cw(c92.648,102.362) C_CAN_10UF.2@94.488,102.362 ; C_CAN_10UF.2@94.234,102.362 cw(c94.234,99.909) 95.968,101.644 ; 97.917,91.186 97.917,97.663 97.917,99.695 94.234,103.378 ; 97.917,96.17 ccw(c99.472,96.17) v1@98.202,95.272 ; 97.944,93.425 cw(c99.499,93.425) VDD2.1@98.171,94.234 ; 94.234,103.378 cw(c93.497,102.641) 94.472,102.272 ccw(c93.497,102.641) 94.234,103.378
  other v1: 94.234,101.346
VCC_5V: 1117_3.3.3 BM1.10 BM2.10 BM3.10 BM4.10 C6_10uf.1 C7_100nf.1 E_HEAD.1 M1-M2.1 M3-M4.1 | length 133.1
  Bottom Layer w1.27: 66.09,90.043 BM3.10 ; 66.139,99.568 BM2.10 ; BM4.10 65.786,80.772 65.786,104.162 BM1.10 72.396,110.772 1117_3.3.3 ; E_HEAD.1@81.084,112.796 cw(c81.084,111.311) 82.134,112.361 cw(c83.184,113.411) 81.699,113.411 cw(c83.184,113.411) 82.134,114.461 cw(c81.084,115.511) E_HEAD.1@81.084,114.026 ; E_HEAD.1@81.092,113.403 cw(c78.461,110.772) 1117_3.3.3@82.182,110.772 ; 82.884,111.611 E_HEAD.1 85.529,117.856 110.236,117.856 116.205,111.887 116.205,103.226 ; 1117_3.3.3@83.26,111.235 cw(c82.797,110.772) 1117_3.3.3@83.452,110.772 ; M1-M2.1 116.205,93.802 116.205,103.226 ; M3-M4.1 116.205,103.226
XTAL1: 8MHZ.1 C1_22PF.2 STM32_1.5 | length 14.3
  Top Layer w0.254: C1_22PF.2@85.524,95.324 cw(c85.957,94.891) 85.957,95.504 cw(c85.957,96.117) C1_22PF.2@85.524,95.684 ; C1_22PF.2@85.547,95.352 cw(c85.741,95.207) 85.803,95.441 cw(c85.903,95.811) C1_22PF.2@85.567,95.626 ; C1_22PF.2@85.56,95.638 ccw(c85.721,95.738) 85.77,95.555 ccw(c85.85,95.256) C1_22PF.2@85.572,95.392 ; C1_22PF.2@85.567,95.504 cw(c85.567,94.838) 8MHZ.1@86.038,95.309 ; C1_22PF.2@85.58,95.504 ccw(c85.58,96.088) 8MHZ.1@86.129,95.888 ; 8MHZ.1@85.89,95.975 cw(c85.217,96.221) C1_22PF.2 86.233,95.504 8MHZ.1 88.801,93.444 STM32_1.5 ; 8MHZ.1@86.487,95.123 cw(c86.487,93.59) 87.571,94.674 cw(c88.655,95.758) 8MHZ.1@87.122,95.758 ; 8MHZ.1@86.487,95.377 cw(c86.487,94.457) 87.137,95.108 cw(c87.788,95.758) 8MHZ.1@86.868,95.758
XTAL2: 8MHZ.2 C2_22PF.2 STM32_1.6 | length 14.3
  Top Layer w0.254: C2_22PF.2@85.524,90.752 cw(c85.957,90.319) 85.957,90.932 cw(c85.957,91.545) C2_22PF.2@85.524,91.112 ; C2_22PF.2@85.547,91.084 ccw(c85.741,91.229) 85.803,90.995 ccw(c85.903,90.625) C2_22PF.2@85.567,90.81 ; C2_22PF.2@85.56,90.798 cw(c85.721,90.698) 85.77,90.881 cw(c85.85,91.18) C2_22PF.2@85.572,91.044 ; C2_22PF.2@85.567,90.932 ccw(c85.567,91.598) 8MHZ.2@86.038,91.127 ; C2_22PF.2@85.58,90.932 cw(c85.58,90.348) 8MHZ.2@86.129,90.548 ; 8MHZ.2@85.89,90.461 ccw(c85.217,90.215) C2_22PF.2 86.233,90.932 8MHZ.2 88.753,92.944 STM32_1.6 ; 8MHZ.2@86.487,91.059 ccw(c86.487,91.979) 87.137,91.328 ccw(c87.788,90.678) 8MHZ.2@86.868,90.678 ; 8MHZ.2@86.487,91.313 ccw(c86.487,92.846) 87.571,91.762 ccw(c88.655,90.678) 8MHZ.2@87.122,90.678
pads on no net: BM1.1 BM1.3 BM1.4 BM1.5 BM1.6 BM1.9 BM2.1 BM2.3 BM2.4 BM2.5 BM2.6 BM2.9 BM3.1 BM3.3 BM3.4 BM3.5 BM3.6 BM3.9 BM4.1 BM4.3 BM4.4 BM4.5 BM4.6 BM4.9 CANH_CANL.3 M1-M2.6 M1-M2.10 M3-M4.6 M3-M4.10 STM32_1.2 STM32_1.3 STM32_1.4 STM32_1.8 STM32_1.9 STM32_1.10 STM32_1.11 STM32_1.20 STM32_1.21 STM32_1.24 STM32_1.29 STM32_1.30 STM32_1.45 STM32_1.51 STM32_1.52 STM32_1.53 STM32_1.54 STM32_1.57 STM32_1.60

## Keep-outs
Keep-Out Layer:
  the board outline again, w0.152

## Silkscreen, mask and mechanical layers (free items; w line width, h text height)
Top Overlay:
  text "+" at 83.439,113.03 h0.89
  text "L" at 98.552,106.934 h1.52
  text "RX" at 92.964,82.804 h0.64

## Text inside footprints (layer, text, board x,y; h text height)
?: Top Layer "N W P U" at 72.263,119.634 h0.76; Top Layer "DIPAN" at 72.263,118.11 h0.76; Bottom Layer "N W P U" at 72.263,119.634 h0.76; Bottom Layer "DIPAN" at 72.263,118.11 h0.76